# Altium PCB FPW1-0-2.PcbDoc (part 8 of 11)
Units mm, origin at the board's own origin, x right, y up, seen from the top; angles counter-clockwise.
Board outline 85 x 56 mm, 4 copper layers (Top Layer, GND_Plane, 3V3_Plane, Bottom Layer); 182 components, 321 nets, 1106 pads, 360 vias.
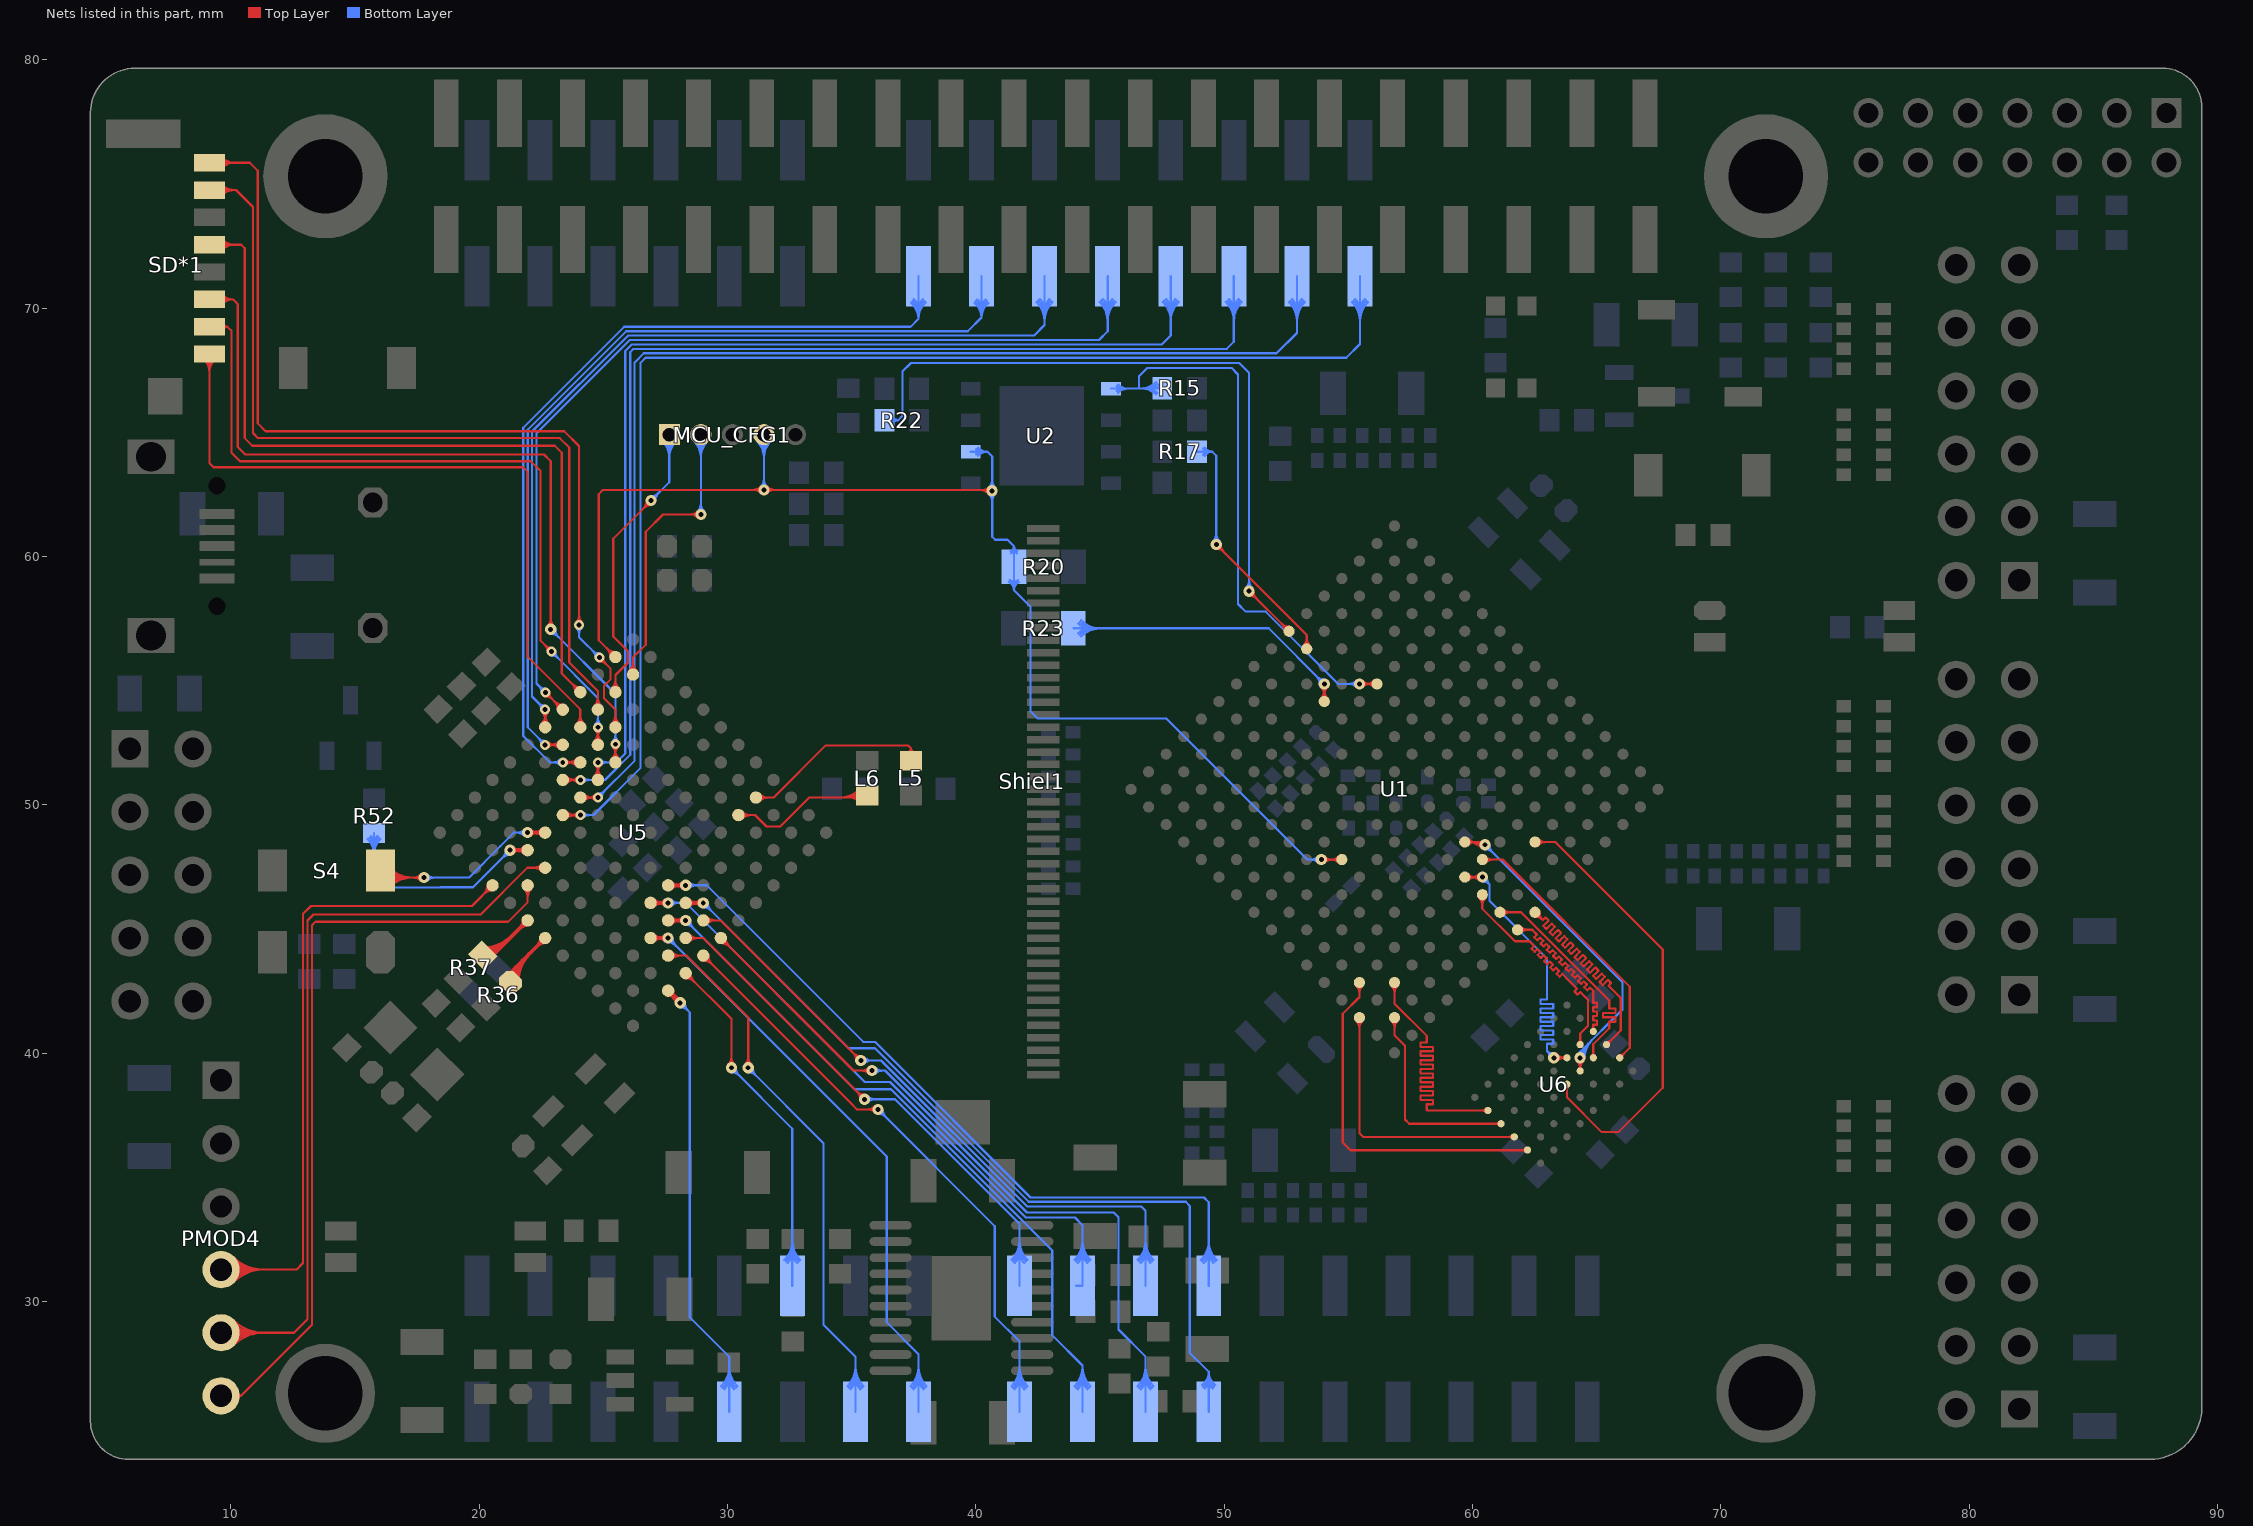
[diagram p10: the nets of this part, all layers, seen from the top]

## Via types
v1: diameter 0.45, hole 0.2, Top Layer to Bottom Layer, tented both sides, 280 vias
v2: diameter 0.61, hole 0.33, Top Layer to Bottom Layer, tented both sides, 40 vias
v3: diameter 0.403, hole 0.2, Top Layer to Bottom Layer, tented both sides, 15 vias
v4: diameter 0.5, hole 0.2, Top Layer to Bottom Layer, tented both sides, 12 vias
v5: diameter 0.864, hole 0.508, Top Layer to Bottom Layer, tented both sides, 11 vias
v6: diameter 0.864, hole 0.356, Top Layer to Bottom Layer, tented both sides, 1 vias
v7: diameter 0.864, hole 0.381, Top Layer to Bottom Layer, tented both sides, 1 vias

## Nets (pads, with @x,y where several pads share a name; then routed paths per layer and width w, separated by ;. In a path a pad name is that pad's centre, name@x,y a point inside that pad or via, vN(x,y) a via of type N, cw(c..) or ccw(c..) an arc to the next point about the centre after c; other vN are vias at no path point) (continued)
PTA24: Shiel1.37 U5.K12 | length 26.4
  Top Layer w0.089: U5.K12@27.613,42.317 cw(c27.613,41.821) 27.964,42.172 cw(c28.315,42.523) U5.K12@27.819,42.523 ; U5.K12@27.613,42.406 cw(c27.613,42.125) 27.813,42.324 cw(c28.012,42.523) U5.K12@27.73,42.523 ; U5.K12@27.613,42.523 v1(28.099,42.037) ; U5.K12@27.717,42.315 cw(c27.51,41.956) v1@27.92,42.012 ; U5.K12@27.822,42.419 ccw(c28.18,42.626) v1@28.124,42.216 ; 27.85,42.238 ccw(c27.983,42.47) v1@28.053,42.211 ; 27.875,42.224 cw(c27.738,41.987) v1@28.009,42.025 ; 27.898,42.287 cw(c27.667,42.153) v1@27.925,42.084 ; 27.912,42.262 ccw(c28.149,42.398) v1@28.112,42.128 ; v1@27.919,42.037 ccw(c27.483,42.037) 27.791,42.345 ccw(c28.099,42.653) v1@28.099,42.218
  Bottom Layer w0.089: v1@28.099,41.856 cw(c28.099,41.421) 28.408,41.729 cw(c28.716,42.037) v1@28.28,42.037 ; v1(28.099,42.037) 28.486,41.65 28.486,29.375 30.074,27.788 Shiel1.37@30.074,25.565 ; Shiel1.37@29.751,26.602 ccw(c28.974,27.38) 30.074,27.38 ccw(c31.173,27.38) Shiel1.37@30.396,26.602 ; Shiel1.37@29.814,26.539 ccw(c29.188,27.165) 30.074,27.165 ccw(c30.959,27.165) Shiel1.37@30.333,26.539 ; Shiel1.37@29.877,26.476 ccw(c29.403,26.951) 30.074,26.951 ccw(c30.744,26.951) Shiel1.37@30.27,26.476
PTA25: Shiel1.40 U5.J12 | length 21.1
  Top Layer w0.089: U5.J12@28.321,43.024 cw(c28.321,42.528) 28.671,42.879 cw(c29.022,43.23) U5.J12@28.526,43.23 ; U5.J12@28.321,43.113 cw(c28.321,42.832) 28.52,43.031 cw(c28.719,43.23) U5.J12@28.437,43.23 ; U5.J12@28.321,43.23 30.162,41.388 v1(30.162,39.421) ; v1@30.035,39.548 ccw(c29.727,39.857) 30.162,39.857 ccw(c30.598,39.857) v1@30.29,39.548
  Bottom Layer w0.089: v1@30.162,39.24 cw(c30.162,38.804) 30.471,39.113 cw(c30.779,39.421) v1@30.343,39.421 ; v1(30.162,39.421) 32.614,36.97 Shiel1.40@32.614,30.645 ; Shiel1.40@32.291,31.682 ccw(c31.514,32.46) 32.614,32.46 ccw(c33.713,32.46) Shiel1.40@32.936,31.682 ; Shiel1.40@32.354,31.619 ccw(c31.728,32.245) 32.614,32.245 ccw(c33.499,32.245) Shiel1.40@32.873,31.619 ; Shiel1.40@32.417,31.556 ccw(c31.943,32.031) 32.614,32.031 ccw(c33.284,32.031) Shiel1.40@32.81,31.556
PTA26: Shiel1.41 U5.J11 | length 28.7
  Top Layer w0.089: U5.J11@27.613,43.937 28.339,43.937 30.836,41.44 v1(30.836,39.421) ; U5.J11@27.696,43.855 cw(c27.895,43.655) 27.895,43.937 cw(c27.895,44.219) U5.J11@27.696,44.02 ; U5.J11@27.759,43.792 cw(c28.11,43.441) 28.11,43.937 cw(c28.11,44.433) U5.J11@27.759,44.082 ; v1@30.708,39.548 ccw(c30.4,39.857) 30.836,39.857 ccw(c31.271,39.857) v1@30.963,39.548
  Bottom Layer w0.089: v1@30.836,39.24 cw(c30.836,38.804) 31.144,39.113 cw(c31.452,39.421) v1@31.016,39.421 ; v1(30.836,39.421) 33.871,36.386 33.871,29.07 35.154,27.788 Shiel1.41@35.154,25.565 ; Shiel1.41@34.831,26.602 ccw(c34.054,27.38) 35.154,27.38 ccw(c36.253,27.38) Shiel1.41@35.476,26.602 ; Shiel1.41@34.894,26.539 ccw(c34.268,27.165) 35.154,27.165 ccw(c36.039,27.165) Shiel1.41@35.413,26.539 ; Shiel1.41@34.957,26.476 ccw(c34.483,26.951) 35.154,26.951 ccw(c35.824,26.951) Shiel1.41@35.35,26.476
PTA27: Shiel1.43 U5.J10 | length 32
  Top Layer w0.089: U5.J10@26.906,44.644 v1(27.613,44.644) ; U5.J10@26.989,44.562 cw(c27.188,44.363) 27.188,44.644 cw(c27.188,44.926) U5.J10@26.989,44.727 ; U5.J10@27.052,44.499 cw(c27.403,44.148) 27.403,44.644 cw(c27.403,45.14) U5.J10@27.052,44.79 ; 27.246,44.602 cw(c27.303,44.388) v1@27.474,44.529 ; 27.246,44.686 ccw(c27.303,44.901) v1@27.474,44.759 ; 27.306,44.618 ccw(c27.241,44.859) v1@27.457,44.734 ; 27.306,44.67 cw(c27.241,44.429) v1@27.457,44.554 ; 27.379,44.638 cw(c27.421,44.485) v1@27.543,44.586 ; 27.379,44.65 ccw(c27.421,44.804) v1@27.543,44.703 ; v1@27.486,44.517 ccw(c27.178,44.208) 27.178,44.644 ccw(c27.178,45.08) v1@27.486,44.772
  Bottom Layer w0.089: v1@27.613,44.464 cw(c27.613,44.028) 27.922,44.336 cw(c28.23,44.644) v1@27.794,44.644 ; v1(27.613,44.644) 36.411,35.847 36.411,29.172 37.694,27.889 Shiel1.43@37.694,25.565 ; Shiel1.43@37.371,26.602 ccw(c36.594,27.38) 37.694,27.38 ccw(c38.793,27.38) Shiel1.43@38.016,26.602 ; Shiel1.43@37.434,26.539 ccw(c36.808,27.165) 37.694,27.165 ccw(c38.579,27.165) Shiel1.43@37.953,26.539 ; Shiel1.43@37.497,26.476 ccw(c37.023,26.951) 37.694,26.951 ccw(c38.364,26.951) Shiel1.43@37.89,26.476
PTA28: Shiel1.45 U5.H12 | length 30.9
  Top Layer w0.089: U5.H12@29.028,43.732 cw(c29.028,43.235) 29.379,43.586 cw(c29.729,43.937) U5.H12@29.233,43.937 ; U5.H12@29.028,43.82 cw(c29.028,43.539) 29.227,43.738 cw(c29.426,43.937) U5.H12@29.144,43.937 ; U5.H12@29.028,43.937 34.973,37.992 34.973,37.987 35.205,37.754 35.21,37.754 35.22,37.744 v1(36.068,37.744) ; v1@35.94,37.617 ccw(c35.632,37.309) 35.632,37.744 ccw(c35.632,38.18) v1@35.94,37.872
  Bottom Layer w0.089: v1@36.068,37.564 cw(c36.068,37.128) 36.376,37.436 cw(c36.684,37.744) v1@36.249,37.744 ; v1(36.068,37.744) 40.767,33.045 40.767,29.4 41.758,28.41 Shiel1.45@41.758,25.565 ; Shiel1.45@41.435,26.602 ccw(c40.658,27.38) 41.758,27.38 ccw(c42.857,27.38) Shiel1.45@42.08,26.602 ; Shiel1.45@41.498,26.539 ccw(c40.872,27.165) 41.758,27.165 ccw(c42.643,27.165) Shiel1.45@42.017,26.539 ; Shiel1.45@41.561,26.476 ccw(c41.087,26.951) 41.758,26.951 ccw(c42.428,26.951) Shiel1.45@41.954,26.476
PTA29: Shiel1.46 U5.H11 | length 27.5
  Top Layer w0.089: U5.H11@28.321,44.644 29.029,44.644 v1(35.522,38.151) ; U5.H11@28.403,44.562 cw(c28.602,44.363) 28.602,44.644 cw(c28.602,44.926) U5.H11@28.403,44.727 ; U5.H11@28.466,44.499 cw(c28.817,44.148) 28.817,44.644 cw(c28.817,45.14) U5.H11@28.466,44.79 ; v1@35.341,38.151 ccw(c34.905,38.151) 35.214,38.459 ccw(c35.522,38.767) v1@35.522,38.331
  Bottom Layer w0.089: v1(35.522,38.151) 36.744,38.151 41.758,33.137 Shiel1.46@41.758,30.645 ; v1@35.65,38.023 cw(c35.958,37.715) 35.958,38.151 cw(c35.958,38.587) v1@35.65,38.278 ; Shiel1.46@41.435,31.682 ccw(c40.658,32.46) 41.758,32.46 ccw(c42.857,32.46) Shiel1.46@42.08,31.682 ; Shiel1.46@41.498,31.619 ccw(c40.872,32.245) 41.758,32.245 ccw(c42.643,32.245) Shiel1.46@42.017,31.619 ; Shiel1.46@41.561,31.556 ccw(c41.087,32.031) 41.758,32.031 ccw(c42.428,32.031) Shiel1.46@41.954,31.556
PTB0: Shiel1.47 U5.H10 | length 36
  Top Layer w0.089: U5.H10@27.613,45.351 v1(28.321,45.351) ; U5.H10@27.696,45.269 cw(c27.895,45.07) 27.895,45.351 cw(c27.895,45.633) U5.H10@27.696,45.434 ; U5.H10@27.759,45.206 cw(c28.11,44.855) 28.11,45.351 cw(c28.11,45.848) U5.H10@27.759,45.497 ; 27.953,45.309 cw(c28.01,45.095) v1@28.181,45.236 ; 27.953,45.393 ccw(c28.01,45.608) v1@28.181,45.466 ; 28.013,45.325 ccw(c27.948,45.566) v1@28.164,45.442 ; 28.013,45.377 cw(c27.948,45.136) v1@28.164,45.261 ; 28.087,45.345 cw(c28.128,45.192) v1@28.25,45.293 ; 28.087,45.357 ccw(c28.128,45.511) v1@28.25,45.41 ; v1@28.193,45.224 ccw(c27.885,44.915) 27.885,45.351 ccw(c27.885,45.787) v1@28.193,45.479
  Bottom Layer w0.089: v1@28.321,45.171 cw(c28.321,44.735) 28.629,45.043 cw(c28.937,45.351) v1@28.501,45.351 ; v1(28.321,45.351) 35.115,38.557 36.589,38.557 43.078,32.068 43.078,28.651 44.298,27.432 Shiel1.47@44.298,25.565 ; Shiel1.47@43.975,26.602 ccw(c43.198,27.38) 44.298,27.38 ccw(c45.397,27.38) Shiel1.47@44.62,26.602 ; Shiel1.47@44.038,26.539 ccw(c43.412,27.165) 44.298,27.165 ccw(c45.183,27.165) Shiel1.47@44.557,26.539 ; Shiel1.47@44.101,26.476 ccw(c43.627,26.951) 44.298,26.951 ccw(c44.968,26.951) Shiel1.47@44.494,26.476
PTB1: Shiel1.48 U5.H9 | length 33.5
  Top Layer w0.089: U5.H9@26.906,46.058 v1(27.613,46.058) ; U5.H9@26.989,45.976 cw(c27.188,45.777) 27.188,46.058 cw(c27.188,46.34) U5.H9@26.989,46.141 ; U5.H9@27.052,45.913 cw(c27.403,45.562) 27.403,46.058 cw(c27.403,46.555) U5.H9@27.052,46.204 ; 27.246,46.016 cw(c27.303,45.802) v1@27.474,45.943 ; 27.246,46.1 ccw(c27.303,46.315) v1@27.474,46.173 ; 27.306,46.032 ccw(c27.241,46.273) v1@27.457,46.149 ; 27.306,46.084 cw(c27.241,45.843) v1@27.457,45.968 ; 27.379,46.052 cw(c27.421,45.899) v1@27.543,46 ; 27.379,46.065 ccw(c27.421,46.218) v1@27.543,46.117 ; v1@27.486,45.931 ccw(c27.178,45.623) 27.178,46.058 ccw(c27.178,46.494) v1@27.486,46.186
  Bottom Layer w0.089: v1(27.613,46.058) 28.326,46.058 35.535,38.849 36.548,38.849 42.009,33.388 43.993,33.388 44.298,33.083 Shiel1.48@44.298,30.645 Shiel1.48@44.044,30.645 ; v1@27.741,45.931 cw(c28.049,45.623) 28.049,46.058 cw(c28.049,46.494) v1@27.741,46.186 ; Shiel1.48@43.975,31.682 ccw(c43.198,32.46) 44.298,32.46 ccw(c45.397,32.46) Shiel1.48@44.62,31.682 ; Shiel1.48@44.038,31.619 ccw(c43.412,32.245) 44.298,32.245 ccw(c45.183,32.245) Shiel1.48@44.557,31.619 ; Shiel1.48@44.101,31.556 ccw(c43.627,32.031) 44.298,32.031 ccw(c44.968,32.031) Shiel1.48@44.494,31.556
PTB2: Shiel1.49 U5.G12 | length 35.7
  Top Layer w0.089: U5.G12@29.735,44.439 cw(c29.735,43.942) 30.086,44.293 cw(c30.437,44.644) U5.G12@29.94,44.644 ; U5.G12@29.735,44.528 cw(c29.735,44.246) 29.934,44.445 cw(c30.133,44.644) U5.G12@29.851,44.644 ; U5.G12@29.735,44.644 35.072,39.306 v1(35.827,39.306) ; v1@35.699,39.179 ccw(c35.391,38.871) 35.391,39.306 ccw(c35.391,39.742) v1@35.699,39.434
  Bottom Layer w0.089: v1(35.827,39.306) 36.342,39.306 42.057,33.591 45.555,33.591 45.745,33.401 45.745,28.88 46.838,27.788 Shiel1.49@46.838,25.565 ; v1@35.954,39.179 cw(c36.263,38.871) 36.263,39.306 cw(c36.263,39.742) v1@35.954,39.434 ; Shiel1.49@46.515,26.602 ccw(c45.738,27.38) 46.838,27.38 ccw(c47.937,27.38) Shiel1.49@47.16,26.602 ; Shiel1.49@46.578,26.539 ccw(c45.952,27.165) 46.838,27.165 ccw(c47.723,27.165) Shiel1.49@47.097,26.539 ; Shiel1.49@46.641,26.476 ccw(c46.167,26.951) 46.838,26.951 ccw(c47.508,26.951) Shiel1.49@47.034,26.476
PTB3: Shiel1.50 U5.G11 | length 32.4
  Top Layer w0.089: U5.G11@29.028,45.351 29.731,45.351 v1(35.369,39.713) ; U5.G11@29.11,45.269 cw(c29.309,45.07) 29.309,45.351 cw(c29.309,45.633) U5.G11@29.11,45.434 ; U5.G11@29.173,45.206 cw(c29.524,44.855) 29.524,45.351 cw(c29.524,45.848) U5.G11@29.173,45.497 ; v1@35.189,39.713 ccw(c34.753,39.713) 35.061,40.021 ccw(c35.369,40.329) v1@35.369,39.893
  Bottom Layer w0.089: v1(35.369,39.713) 36.187,39.713 42.068,33.833 46.66,33.833 46.838,33.655 Shiel1.50@46.838,30.645 ; v1@35.497,39.585 cw(c35.805,39.277) 35.805,39.713 cw(c35.805,40.149) v1@35.497,39.841 ; Shiel1.50@46.515,31.682 ccw(c45.738,32.46) 46.838,32.46 ccw(c47.937,32.46) Shiel1.50@47.16,31.682 ; Shiel1.50@46.578,31.619 ccw(c45.952,32.245) 46.838,32.245 ccw(c47.723,32.245) Shiel1.50@47.097,31.619 ; Shiel1.50@46.641,31.556 ccw(c46.167,32.031) 46.838,32.031 ccw(c47.508,32.031) Shiel1.50@47.034,31.556
PTB4: Shiel1.51 U5.G10 | length 40.8
  Top Layer w0.089: U5.G10@28.321,46.058 v1(29.028,46.058) ; U5.G10@28.403,45.976 cw(c28.602,45.777) 28.602,46.058 cw(c28.602,46.34) U5.G10@28.403,46.141 ; U5.G10@28.466,45.913 cw(c28.817,45.562) 28.817,46.058 cw(c28.817,46.555) U5.G10@28.466,46.204 ; 28.66,46.016 cw(c28.717,45.802) v1@28.889,45.943 ; 28.66,46.1 ccw(c28.717,46.315) v1@28.889,46.173 ; 28.72,46.032 ccw(c28.655,46.273) v1@28.871,46.149 ; 28.72,46.084 cw(c28.655,45.843) v1@28.871,45.968 ; 28.794,46.052 cw(c28.835,45.899) v1@28.957,46 ; 28.794,46.065 ccw(c28.835,46.218) v1@28.957,46.117 ; v1@28.9,45.931 ccw(c28.592,45.623) 28.592,46.058 ccw(c28.592,46.494) v1@28.9,46.186
  Bottom Layer w0.089: v1@29.028,45.878 cw(c29.028,45.442) 29.336,45.75 cw(c29.644,46.058) v1@29.208,46.058 ; v1(29.028,46.058) 34.878,40.208 35.944,40.208 42.128,34.023 48.45,34.023 48.616,33.858 48.616,27.94 49.378,27.178 ; Shiel1.51@49.109,26.648 ccw(c48.721,27.178) 49.378,27.178 ; Shiel1.51@49.161,26.576 ccw(c48.849,27.003) 49.378,27.003 ccw(c49.906,27.003) Shiel1.51@49.594,26.576 ; Shiel1.51@49.214,26.504 ccw(c48.977,26.828) 49.378,26.828 ccw(c49.778,26.828) Shiel1.51@49.542,26.504 ; Shiel1.51@49.378,25.565 49.378,27.178 ; Shiel1.51@49.647,26.648 cw(c50.035,27.178) 49.378,27.178
PTB5: Shiel1.52 U5.G9 | length 38.4
  Top Layer w0.089: U5.G9@27.613,46.765 v1(28.321,46.765) ; U5.G9@27.696,46.683 cw(c27.895,46.484) 27.895,46.765 cw(c27.895,47.047) U5.G9@27.696,46.848 ; U5.G9@27.759,46.62 cw(c28.11,46.269) 28.11,46.765 cw(c28.11,47.262) U5.G9@27.759,46.911 ; 27.953,46.723 cw(c28.01,46.509) v1@28.181,46.65 ; 27.953,46.808 ccw(c28.01,47.022) v1@28.181,46.88 ; 28.013,46.739 ccw(c27.948,46.981) v1@28.164,46.856 ; 28.013,46.791 cw(c27.948,46.55) v1@28.164,46.675 ; 28.087,46.759 cw(c28.128,46.606) v1@28.25,46.707 ; 28.087,46.772 ccw(c28.128,46.925) v1@28.25,46.824 ; v1@28.193,46.638 ccw(c27.885,46.33) 27.885,46.765 ccw(c27.885,47.201) v1@28.193,46.893
  Bottom Layer w0.089: v1(28.321,46.765) 29.168,46.765 35.471,40.462 35.941,40.462 42.202,34.201 49.187,34.201 49.378,34.011 Shiel1.52@49.378,30.645 ; v1@28.448,46.638 cw(c28.756,46.33) 28.756,46.765 cw(c28.756,47.201) v1@28.448,46.893 ; Shiel1.52@49.055,31.682 ccw(c48.278,32.46) 49.378,32.46 ccw(c50.477,32.46) Shiel1.52@49.7,31.682 ; Shiel1.52@49.118,31.619 ccw(c48.492,32.245) 49.378,32.245 ccw(c50.263,32.245) Shiel1.52@49.637,31.619 ; Shiel1.52@49.181,31.556 ccw(c48.707,32.031) 49.378,32.031 ccw(c50.048,32.031) Shiel1.52@49.574,31.556
PTD8: L6.1 U5.C9 | length 10.1
  Top Layer w0.089: U5.C9@30.442,49.594 31.115,49.594 31.572,49.136 32.131,49.136 33.299,50.305 L6.1@35.395,50.305 ; U5.C9@30.524,49.511 cw(c30.724,49.312) 30.724,49.594 cw(c30.724,49.876) U5.C9@30.524,49.676 ; U5.C9@30.587,49.449 cw(c30.938,49.098) 30.938,49.594 cw(c30.938,50.09) U5.C9@30.587,49.739 ; 34.535,50.305 ccw(c34.535,51.418) L6.1@35.322,50.631 ; 34.749,50.305 ccw(c34.749,51.203) L6.1@35.385,50.568 ; 34.895,50.305 cw(c34.895,49.701) L6.1@35.322,50.128 ; 34.964,50.305 ccw(c34.964,50.989) L6.1@35.448,50.505 ; 35.11,50.305 cw(c35.11,49.916) L6.1@35.385,50.191 ; L6.1@35.179,50.305 ccw(c35.179,50.774) L6.1@35.511,50.442
PTD9: L5.1 U5.B9 | length 9.3
  Top Layer w0.089: U5.B9@31.149,50.301 31.861,50.301 33.96,52.4 37.275,52.4 37.389,52.286 ; U5.B9@31.231,50.219 cw(c31.431,50.019) 31.431,50.301 cw(c31.431,50.583) U5.B9@31.231,50.384 ; U5.B9@31.294,50.156 cw(c31.645,49.805) 31.645,50.301 cw(c31.645,50.797) U5.B9@31.294,50.446 ; L5.1@37.268,52.114 ccw(c37.206,52.286) 37.389,52.286 ; L5.1@37.389,51.779 37.389,52.286 ; L5.1@37.51,52.114 cw(c37.572,52.286) 37.389,52.286
PTE0: SD*1.8 U5.D3 | length 43.3
  Top Layer w0.089: SD*1.8@9.144,75.857 10.77,75.857 11.087,75.54 11.087,65.367 11.405,65.049 23.431,65.049 24.028,64.453 v3(24.028,57.252) ; SD*1.8@9.572,75.704 cw(c9.942,75.334) 9.942,75.857 cw(c9.942,76.38) SD*1.8@9.572,76.01 ; SD*1.8@9.635,75.641 cw(c10.157,75.119) 10.157,75.857 cw(c10.157,76.595) SD*1.8@9.635,76.073 ; v3@23.917,57.363 ccw(c23.649,57.631) 24.028,57.631 ccw(c24.408,57.631) v3@24.139,57.363 ; v3@24.841,55.786 cw(c24.841,55.407) 25.109,55.675 cw(c25.377,55.944) v3@24.998,55.944 ; v3(24.841,55.944) 25.298,55.486 25.298,55.067 25.032,54.8 25.032,54.297 25.492,53.837 U5.D3@25.492,53.129 ; U5.D3@25.347,53.275 ccw(c24.996,53.626) 25.492,53.626 ccw(c25.988,53.626) U5.D3@25.637,53.275 ; U5.D3@25.41,53.212 ccw(c25.211,53.411) 25.492,53.411 ccw(c25.774,53.411) U5.D3@25.575,53.212
  Bottom Layer w0.089: v3@23.917,57.141 cw(c23.649,56.872) 24.028,56.872 cw(c24.408,56.872) v3@24.139,57.141 ; v3(24.028,57.252) 24.028,56.756 v3(24.841,55.944) ; v3@24.684,55.944 ccw(c24.305,55.944) 24.573,56.212 ccw(c24.841,56.48) v3@24.841,56.101
PTE1: SD*1.7 U5.D2 | length 38.4
  Top Layer w0.089: SD*1.7@9.144,74.757 10.219,74.757 10.897,74.079 10.897,64.973 11.1,64.77 23.254,64.77 23.635,64.389 23.635,55.74 24.785,54.59 U5.D2@24.785,53.837 ; SD*1.7@9.572,74.604 cw(c9.942,74.234) 9.942,74.757 cw(c9.942,75.28) SD*1.7@9.572,74.91 ; SD*1.7@9.635,74.541 cw(c10.157,74.019) 10.157,74.757 cw(c10.157,75.495) SD*1.7@9.635,74.973 ; U5.D2@24.64,53.982 ccw(c24.289,54.333) 24.785,54.333 ccw(c25.281,54.333) U5.D2@24.93,53.982 ; U5.D2@24.703,53.919 ccw(c24.503,54.118) 24.785,54.118 ccw(c25.067,54.118) U5.D2@24.868,53.919
PTE2: SD*1.5 U5.D1 | length 35.3
  Top Layer w0.089: SD*1.5@9.144,72.557 10.425,72.557 10.566,72.415 10.566,64.77 10.871,64.465 23.05,64.465 23.33,64.186 23.33,55.292 U5.D1@24.078,54.544 ; SD*1.5@9.572,72.404 cw(c9.942,72.034) 9.942,72.557 cw(c9.942,73.08) SD*1.5@9.572,72.71 ; SD*1.5@9.635,72.341 cw(c10.157,71.819) 10.157,72.557 cw(c10.157,73.295) SD*1.5@9.635,72.773 ; U5.D1@23.872,54.544 ccw(c23.376,54.544) 23.727,54.895 ccw(c24.078,55.245) U5.D1@24.078,54.749 ; U5.D1@23.961,54.544 ccw(c23.68,54.544) 23.879,54.743 ccw(c24.078,54.942) U5.D1@24.078,54.66
PTE3: SD*1.3 U5.E4 | length 38.5
  Top Layer w0.089: SD*1.3@9.144,70.357 10.097,70.357 ; SD*1.3@9.581,70.214 cw(c9.9,69.931) 9.9,70.357 cw(c9.9,70.783) SD*1.3@9.581,70.501 ; SD*1.3@9.648,70.155 cw(c10.097,69.757) 10.097,70.357 ; SD*1.3@9.648,70.56 ccw(c10.097,70.957) 10.097,70.357 ; v1@22.758,57.201 ccw(c22.45,57.51) 22.885,57.51 ccw(c23.321,57.51) v1@23.013,57.201 ; v1(22.885,57.074) 22.885,63.843 22.619,64.11 10.592,64.11 10.287,64.414 10.287,70.168 10.097,70.357 ; U5.E4@25.347,51.861 ccw(c24.996,52.211) 25.492,52.211 ccw(c25.988,52.211) U5.E4@25.637,51.861 ; v3@25.381,52.335 cw(c25.113,52.067) 25.492,52.067 cw(c25.871,52.067) v3@25.603,52.335 ; U5.E4@25.41,51.798 ccw(c25.211,51.997) 25.492,51.997 ccw(c25.774,51.997) U5.E4@25.575,51.798 ; U5.E4@25.492,51.715 v3(25.492,52.446)
  Bottom Layer w0.089: v1@22.885,56.893 cw(c22.885,56.457) 23.194,56.766 cw(c23.502,57.074) v1@23.066,57.074 ; v1(22.885,57.074) 25.492,54.467 v3(25.492,52.446) ; v3@25.381,52.557 ccw(c25.113,52.825) 25.492,52.825 ccw(c25.871,52.825) v3@25.603,52.557
PTE4: SD*1.2 U5.E3 | length 34.6
  Top Layer w0.089: SD*1.2@9.144,69.257 9.864,69.257 ; SD*1.2@9.704,69.147 cw(c9.864,69.086) 9.864,69.257 ; SD*1.2@9.704,69.367 ccw(c9.864,69.428) 9.864,69.257 ; v3@22.752,56.185 ccw(c22.373,56.185) 22.641,56.453 ccw(c22.909,56.721) v3@22.909,56.342 ; v3(22.909,56.185) 22.479,56.615 22.479,63.449 22.085,63.843 10.376,63.843 10.033,64.186 10.033,69.088 9.864,69.257 ; U5.E3@24.64,52.568 ccw(c24.289,52.919) 24.785,52.919 ccw(c25.281,52.919) U5.E3@24.93,52.568 ; v3@24.674,53.018 cw(c24.406,52.75) 24.785,52.75 cw(c25.164,52.75) v3@24.896,53.018 ; U5.E3@24.703,52.505 ccw(c24.503,52.704) 24.785,52.704 ccw(c25.067,52.704) U5.E3@24.868,52.505 ; U5.E3@24.785,52.422 v3(24.785,53.129)
  Bottom Layer w0.089: v3@22.909,56.028 cw(c22.909,55.649) 23.177,55.917 cw(c23.445,56.185) v3@23.066,56.185 ; v3(22.909,56.185) 24.785,54.309 v3(24.785,53.129) ; v3@24.674,53.241 ccw(c24.406,53.509) 24.785,53.509 ccw(c25.164,53.509) v3@24.896,53.241
PTE5: SD*1.1 U5.E2 | length 31.7
  Top Layer w0.089: SD*1.1@8.928,67.941 cw(c8.406,67.419) 9.144,67.419 cw(c9.882,67.419) SD*1.1@9.36,67.941 ; SD*1.1@8.991,68.004 cw(c8.621,67.634) 9.144,67.634 cw(c9.667,67.634) SD*1.1@9.297,68.004 ; SD*1.1@9.144,68.157 9.144,63.767 9.309,63.602 21.768,63.602 21.957,63.413 21.957,55.971 24.078,53.849 U5.E2@24.078,53.129 ; U5.E2@23.933,53.275 ccw(c23.582,53.626) 24.078,53.626 ccw(c24.574,53.626) U5.E2@24.223,53.275 ; U5.E2@23.995,53.212 ccw(c23.796,53.411) 24.078,53.411 ccw(c24.36,53.411) U5.E2@24.16,53.212
PTE6: Shiel1.19 U5.E1 | length 45.1
  Top Layer w0.089: v3@22.669,54.377 cw(c22.669,53.988) 22.945,54.263 ; v3@22.672,54.536 U5.E1@23.371,53.837 ; v3@22.827,54.534 ccw(c23.196,54.534) 22.935,54.273 ; U5.E1@23.165,53.837 ccw(c22.669,53.837) 23.02,54.187 ccw(c23.371,54.538) U5.E1@23.371,54.042 ; U5.E1@23.254,53.837 ccw(c22.973,53.837) 23.172,54.036 ccw(c23.371,54.235) U5.E1@23.371,53.953
  Bottom Layer w0.089: v3@22.512,54.534 ccw(c22.133,54.534) 22.401,54.802 ccw(c22.669,55.07) v3@22.669,54.691 ; v3(22.669,54.534) 22.314,54.889 22.314,64.963 26.07,68.72 44.958,68.72 45.309,69.07 Shiel1.19@45.309,71.285 ; Shiel1.19@44.986,70.248 cw(c44.209,69.47) 45.309,69.47 cw(c46.408,69.47) Shiel1.19@45.631,70.248 ; Shiel1.19@45.049,70.311 cw(c44.423,69.685) 45.309,69.685 cw(c46.194,69.685) Shiel1.19@45.568,70.311 ; Shiel1.19@45.112,70.374 cw(c44.638,69.9) 45.309,69.9 cw(c45.979,69.9) Shiel1.19@45.505,70.374
PTE7: Shiel1.21 U5.F4 | length 49.4
  Top Layer w0.089: U5.F4@24.64,51.153 ccw(c24.289,51.504) 24.785,51.504 ccw(c25.281,51.504) U5.F4@24.93,51.153 ; v3@24.674,51.604 cw(c24.406,51.336) 24.785,51.336 cw(c25.164,51.336) v3@24.896,51.604 ; U5.F4@24.703,51.091 ccw(c24.503,51.29) 24.785,51.29 ccw(c25.067,51.29) U5.F4@24.868,51.091 ; U5.F4@24.785,51.008 v3(24.785,51.715)
  Bottom Layer w0.089: v3(24.785,51.715) 25.528,51.715 25.883,52.07 25.883,68.28 26.144,68.542 47.485,68.542 47.849,68.905 Shiel1.21@47.849,71.285 ; v3@24.896,51.604 cw(c25.164,51.336) 25.164,51.715 cw(c25.164,52.094) v3@24.896,51.826 ; Shiel1.21@47.526,70.248 cw(c46.749,69.47) 47.849,69.47 cw(c48.948,69.47) Shiel1.21@48.171,70.248 ; Shiel1.21@47.589,70.311 cw(c46.963,69.685) 47.849,69.685 cw(c48.734,69.685) Shiel1.21@48.108,70.311 ; Shiel1.21@47.652,70.374 cw(c47.178,69.9) 47.849,69.9 cw(c48.519,69.9) Shiel1.21@48.045,70.374
PTE8: Shiel1.13 U5.F3 | length 40.6
  Top Layer w0.089: v3(23.371,51.715) U5.F3@24.078,51.715 ; v3@23.482,51.604 cw(c23.75,51.336) 23.75,51.715 cw(c23.75,52.094) v3@23.482,51.826 ; U5.F3@23.933,51.57 ccw(c23.582,51.219) 23.582,51.715 ccw(c23.582,52.211) U5.F3@23.933,51.861 ; U5.F3@23.995,51.633 ccw(c23.796,51.434) 23.796,51.715 ccw(c23.796,51.997) U5.F3@23.995,51.798
  Bottom Layer w0.089: v3@23.26,51.604 ccw(c22.992,51.336) 22.992,51.715 ccw(c22.992,52.094) v3@23.26,51.826 ; v3(23.371,51.715) 22.843,51.715 21.78,52.778 21.78,65.184 25.85,69.253 37.376,69.253 37.689,69.566 ; Shiel1.13@37.389,70.227 cw(c36.809,69.566) 37.689,69.566 ; Shiel1.13@37.447,70.294 cw(c36.981,69.762) 37.689,69.762 cw(c38.397,69.762) Shiel1.13@37.93,70.294 ; Shiel1.13@37.506,70.361 cw(c37.152,69.958) 37.689,69.958 cw(c38.225,69.958) Shiel1.13@37.872,70.361 ; Shiel1.13@37.689,71.285 37.689,69.566 ; Shiel1.13@37.989,70.227 ccw(c38.568,69.566) 37.689,69.566
PTE9: Shiel1.15 U5.F2 | length 41.1
  Top Layer w0.089: v3(22.664,52.422) U5.F2@23.371,52.422 ; v3@22.775,52.311 cw(c23.043,52.043) 23.043,52.422 cw(c23.043,52.801) v3@22.775,52.533 ; U5.F2@23.225,52.277 ccw(c22.875,51.926) 22.875,52.422 ccw(c22.875,52.919) U5.F2@23.225,52.568 ; U5.F2@23.288,52.34 ccw(c23.089,52.141) 23.089,52.422 ccw(c23.089,52.704) U5.F2@23.288,52.505
  Bottom Layer w0.089: v3@22.507,52.422 ccw(c22.128,52.422) 22.396,52.69 ccw(c22.664,52.959) v3@22.664,52.579 ; v3(22.664,52.422) 21.958,53.128 21.958,65.11 25.923,69.075 39.675,69.075 40.229,69.629 ; Shiel1.15@39.946,70.213 cw(c39.485,69.629) 40.229,69.629 ; Shiel1.15@40.001,70.282 cw(c39.63,69.813) 40.229,69.813 cw(c40.827,69.813) Shiel1.15@40.456,70.282 ; Shiel1.15@40.056,70.352 cw(c39.775,69.996) 40.229,69.996 cw(c40.682,69.996) Shiel1.15@40.401,70.352 ; Shiel1.15@40.229,71.285 40.229,69.629 ; Shiel1.15@40.511,70.213 ccw(c40.973,69.629) 40.229,69.629
PTE10: Shiel1.17 U5.F1 | length 43.1
  Top Layer w0.089: U5.F1@22.518,53.275 ccw(c22.167,53.626) 22.664,53.626 ccw(c23.16,53.626) U5.F1@22.809,53.275 ; v3@22.553,53.726 cw(c22.285,53.457) 22.664,53.457 cw(c23.043,53.457) v3@22.775,53.726 ; U5.F1@22.581,53.212 ccw(c22.382,53.411) 22.664,53.411 ccw(c22.945,53.411) U5.F1@22.746,53.212 ; U5.F1@22.664,53.129 v3(22.664,53.837)
  Bottom Layer w0.089: v3@22.507,53.837 ccw(c22.128,53.837) 22.396,54.105 ccw(c22.664,54.373) v3@22.664,53.994 ; v3(22.664,53.837) 22.136,54.364 22.136,65.037 25.997,68.897 42.342,68.897 42.769,69.324 Shiel1.17@42.769,71.285 ; Shiel1.17@42.446,70.248 cw(c41.669,69.47) 42.769,69.47 cw(c43.868,69.47) Shiel1.17@43.091,70.248 ; Shiel1.17@42.509,70.311 cw(c41.883,69.685) 42.769,69.685 cw(c43.654,69.685) Shiel1.17@43.028,70.311 ; Shiel1.17@42.572,70.374 cw(c42.098,69.9) 42.769,69.9 cw(c43.439,69.9) Shiel1.17@42.965,70.374
PTE11: Shiel1.25 U5.G4 | length 54.9
  Top Layer w0.089: U5.G4@24.078,50.301 v3(24.785,50.301) ; U5.G4@24.16,50.219 cw(c24.36,50.019) 24.36,50.301 cw(c24.36,50.583) U5.G4@24.16,50.384 ; U5.G4@24.223,50.156 cw(c24.574,49.805) 24.574,50.301 cw(c24.574,50.797) U5.G4@24.223,50.446 ; v3@24.674,50.19 ccw(c24.406,49.922) 24.406,50.301 ccw(c24.406,50.68) v3@24.674,50.412
  Bottom Layer w0.089: v3(24.785,50.301) 26.264,51.78 26.264,67.818 26.632,68.186 52.108,68.186 52.929,69.007 Shiel1.25@52.929,71.285 ; v3@24.785,50.458 ccw(c24.785,50.837) 25.053,50.569 ccw(c25.321,50.301) v3@24.942,50.301 ; Shiel1.25@52.606,70.248 cw(c51.829,69.47) 52.929,69.47 cw(c54.028,69.47) Shiel1.25@53.251,70.248 ; Shiel1.25@52.669,70.311 cw(c52.043,69.685) 52.929,69.685 cw(c53.814,69.685) Shiel1.25@53.188,70.311 ; Shiel1.25@52.732,70.374 cw(c52.258,69.9) 52.929,69.9 cw(c53.599,69.9) Shiel1.25@53.125,70.374
PTE12: Shiel1.23 U5.G3 | length 53
  Top Layer w0.089: U5.G3@23.371,51.008 v3(24.078,51.008) ; U5.G3@23.453,50.926 cw(c23.652,50.727) 23.652,51.008 cw(c23.652,51.29) U5.G3@23.453,51.091 ; U5.G3@23.516,50.863 cw(c23.867,50.512) 23.867,51.008 cw(c23.867,51.504) U5.G3@23.516,51.153 ; v3@23.967,50.897 ccw(c23.699,50.629) 23.699,51.008 ccw(c23.699,51.387) v3@23.967,51.119
  Bottom Layer w0.089: v3(24.078,51.008) 25.072,51.008 26.086,52.022 26.086,68.232 26.218,68.364 50.102,68.364 50.389,68.651 Shiel1.23@50.389,71.285 ; v3@24.189,50.897 cw(c24.457,50.629) 24.457,51.008 cw(c24.457,51.387) v3@24.189,51.119 ; Shiel1.23@50.066,70.248 cw(c49.289,69.47) 50.389,69.47 cw(c51.488,69.47) Shiel1.23@50.711,70.248 ; Shiel1.23@50.129,70.311 cw(c49.503,69.685) 50.389,69.685 cw(c51.274,69.685) Shiel1.23@50.648,70.311 ; Shiel1.23@50.192,70.374 cw(c49.718,69.9) 50.389,69.9 cw(c51.059,69.9) Shiel1.23@50.585,70.374
PTE24: PMOD4.4 U5.M4 | length 36.8
  Top Layer w0.089: PMOD4.4@9.614,31.293 12.649,31.293 12.916,31.559 12.916,45.618 13.233,45.936 19.713,45.936 U5.M4@20.542,46.765 ; PMOD4.4@9.861,31.045 cw(c10.459,30.448) 10.459,31.293 cw(c10.459,32.138) PMOD4.4@9.861,31.54 ; PMOD4.4@9.924,30.982 cw(c10.673,30.233) 10.673,31.293 cw(c10.673,32.352) PMOD4.4@9.924,31.603 ; PMOD4.4@9.987,30.92 cw(c10.888,30.019) 10.888,31.293 cw(c10.888,32.567) PMOD4.4@9.987,31.666 ; PMOD4.4@10.05,30.857 cw(c11.103,29.804) 11.103,31.293 cw(c11.103,32.782) PMOD4.4@10.05,31.729 ; PMOD4.4@10.113,30.794 cw(c11.317,29.589) 11.317,31.293 cw(c11.317,32.996) PMOD4.4@10.113,31.792 ; U5.M4@20.337,46.765 cw(c19.841,46.765) 20.192,46.415 cw(c20.542,46.064) U5.M4@20.542,46.56 ; U5.M4@20.426,46.765 cw(c20.144,46.765) 20.343,46.566 cw(c20.542,46.367) U5.M4@20.542,46.649
PTE25: PMOD4.5 U5.K5 | length 41.4
  Top Layer w0.089: PMOD4.5@9.614,28.753 12.548,28.753 13.094,29.299 13.094,45.352 13.335,45.593 20.066,45.593 21.946,47.473 U5.K5@22.664,47.473 ; PMOD4.5@9.861,28.505 cw(c10.459,27.908) 10.459,28.753 cw(c10.459,29.598) PMOD4.5@9.861,29 ; PMOD4.5@9.924,28.442 cw(c10.673,27.693) 10.673,28.753 cw(c10.673,29.812) PMOD4.5@9.924,29.063 ; PMOD4.5@9.987,28.38 cw(c10.888,27.479) 10.888,28.753 cw(c10.888,30.027) PMOD4.5@9.987,29.126 ; PMOD4.5@10.05,28.317 cw(c11.103,27.264) 11.103,28.753 cw(c11.103,30.242) PMOD4.5@10.05,29.189 ; PMOD4.5@10.113,28.254 cw(c11.317,27.049) 11.317,28.753 cw(c11.317,30.456) PMOD4.5@10.113,29.252 ; U5.K5@22.518,47.327 ccw(c22.167,46.976) 22.167,47.473 ccw(c22.167,47.969) U5.K5@22.518,47.618 ; U5.K5@22.581,47.39 ccw(c22.382,47.191) 22.382,47.473 ccw(c22.382,47.754) U5.K5@22.581,47.555
PTE26: R52.2 U5.K4 | length 15.5
  Top Layer w0.089: v1(21.25,48.18) U5.K4@21.957,48.18 ; v1@21.32,48.121 cw(c21.442,48.02) 21.484,48.174 ; v1@21.32,48.238 ccw(c21.442,48.339) 21.484,48.186 ; v1@21.377,48.052 cw(c21.685,47.744) 21.685,48.18 cw(c21.685,48.616) v1@21.377,48.307 ; v1@21.389,48.065 cw(c21.56,47.923) 21.617,48.138 ; v1@21.389,48.295 ccw(c21.56,48.436) 21.617,48.222 ; v1@21.406,48.089 cw(c21.622,47.965) 21.557,48.206 ; v1@21.406,48.27 ccw(c21.622,48.395) 21.557,48.154 ; U5.K4@21.811,48.034 ccw(c21.46,47.683) 21.46,48.18 ccw(c21.46,48.676) U5.K4@21.811,48.325 ; U5.K4@21.874,48.097 ccw(c21.675,47.898) 21.675,48.18 ccw(c21.675,48.461) U5.K4@21.874,48.262
  Bottom Layer w0.089: R52.2@15.522,48.617 cw(c14.915,48.01) 15.773,48.01 cw(c16.632,48.01) R52.2@16.025,48.617 ; R52.2@15.585,48.68 cw(c15.13,48.224) 15.773,48.224 cw(c16.417,48.224) R52.2@15.962,48.68 ; R52.2@15.648,48.742 cw(c15.344,48.439) 15.773,48.439 cw(c16.203,48.439) R52.2@15.899,48.742 ; R52.2@15.773,48.868 15.773,47.244 16.338,46.68 18.448,46.68 18.453,46.685 19.755,46.685 v1(21.25,48.18) ; v1@21.069,48.18 cw(c20.633,48.18) 20.941,47.871 cw(c21.25,47.563) v1@21.25,47.999
PTE27: S4.1 U5.J4 | length 18.7
  Top Layer w0.089: S4.1@16.034,47.358 16.316,47.076 v1(17.78,47.076) ; S4.1@16.221,46.897 cw(c16.654,46.464) 16.654,47.076 ; S4.1@16.221,47.27 ccw(c16.688,47.738) 16.688,47.076 ; S4.1@16.283,46.834 cw(c16.868,46.249) 16.868,47.076 ; S4.1@16.283,47.333 ccw(c16.903,47.952) 16.903,47.076 ; S4.1@16.346,46.771 cw(c17.083,46.034) 17.083,47.076 ; S4.1@16.346,47.396 ccw(c17.118,48.167) 17.118,47.076 ; S4.1@16.409,46.708 cw(c17.298,45.82) 17.298,47.076 ; S4.1@16.409,47.458 ccw(c17.332,48.381) 17.332,47.076 ; v1@17.652,46.948 ccw(c17.344,46.64) 17.344,47.076 ccw(c17.344,47.512) v1@17.652,47.204 ; v1(21.957,48.887) U5.J4@22.664,48.887 ; v1@22.027,48.828 cw(c22.15,48.727) 22.191,48.881 ; v1@22.027,48.945 ccw(c22.15,49.046) 22.191,48.893 ; v1@22.084,48.759 cw(c22.393,48.451) 22.393,48.887 cw(c22.393,49.323) v1@22.084,49.014 ; v1@22.096,48.772 cw(c22.267,48.63) 22.324,48.845 ; v1@22.096,49.002 ccw(c22.267,49.143) 22.324,48.929 ; v1@22.113,48.797 cw(c22.329,48.672) 22.265,48.913 ; v1@22.113,48.977 ccw(c22.329,49.102) 22.265,48.861 ; U5.J4@22.518,48.741 ccw(c22.167,48.391) 22.167,48.887 ccw(c22.167,49.383) U5.J4@22.518,49.032 ; U5.J4@22.581,48.804 ccw(c22.382,48.605) 22.382,48.887 ccw(c22.382,49.168) U5.J4@22.581,48.969
  Bottom Layer w0.089: v1(17.78,47.076) 19.593,47.076 20.853,48.336 20.853,48.344 21.396,48.887 v1(21.957,48.887) ; v1@17.908,46.948 cw(c18.216,46.64) 18.216,47.076 cw(c18.216,47.512) v1@17.908,47.204 ; v1@21.829,48.759 ccw(c21.521,48.451) 21.521,48.887 ccw(c21.521,49.323) v1@21.829,49.014
PTE28: Shiel1.27 U5.H4 | length 58.8
  Top Layer w0.089: U5.H4@23.371,49.594 v3(24.078,49.594) ; U5.H4@23.453,49.511 cw(c23.652,49.312) 23.652,49.594 cw(c23.652,49.876) U5.H4@23.453,49.676 ; U5.H4@23.516,49.449 cw(c23.867,49.098) 23.867,49.594 cw(c23.867,50.09) U5.H4@23.516,49.739 ; v3@23.967,49.483 ccw(c23.699,49.215) 23.699,49.594 ccw(c23.699,49.973) v3@23.967,49.705
  Bottom Layer w0.089: v3(24.078,49.594) 24.605,49.594 26.505,51.493 26.505,67.808 26.706,68.008 54.915,68.008 55.469,68.562 Shiel1.27@55.469,71.285 ; v3@24.189,49.483 cw(c24.457,49.215) 24.457,49.594 cw(c24.457,49.973) v3@24.189,49.705 ; Shiel1.27@55.146,70.248 cw(c54.369,69.47) 55.469,69.47 cw(c56.568,69.47) Shiel1.27@55.791,70.248 ; Shiel1.27@55.209,70.311 cw(c54.583,69.685) 55.469,69.685 cw(c56.354,69.685) Shiel1.27@55.728,70.311 ; Shiel1.27@55.272,70.374 cw(c54.798,69.9) 55.469,69.9 cw(c56.139,69.9) Shiel1.27@55.665,70.374
QSPI_CS: R15.2 U1.L12 U2.1 | length 29.1
  Top Layer w0.089: v1(55.444,54.873) U1.L12@56.151,54.873 ; v1@55.572,54.745 cw(c55.88,54.437) 55.88,54.873 cw(c55.88,55.309) v1@55.572,55.001 ; U1.L12@56.024,54.745 ccw(c55.715,54.437) 55.715,54.873 ccw(c55.715,55.309) U1.L12@56.024,55.001
  Bottom Layer w0.089: U2.1@45.447,66.764 46.571,66.764 ; U2.1@45.672,66.664 cw(c45.914,66.422) 45.914,66.764 cw(c45.914,67.106) U2.1@45.672,66.864 ; U2.1@45.735,66.601 cw(c46.128,66.207) 46.128,66.764 cw(c46.128,67.32) U2.1@45.735,66.927 ; 46.62,66.764 ccw(c46.62,67.666) R15.2@47.258,67.028 ; 46.681,66.764 cw(c46.681,65.949) R15.2@47.258,66.525 ; 46.835,66.764 ccw(c46.835,67.451) R15.2@47.321,66.965 ; 46.896,66.764 cw(c46.896,66.164) R15.2@47.321,66.588 ; 47.049,66.764 ccw(c47.049,67.236) R15.2@47.384,66.902 ; R15.2@47.496,66.764 46.571,66.764 ; v1@55.316,54.745 ccw(c55.008,54.437) 55.008,54.873 ccw(c55.008,55.309) v1@55.316,55.001 ; v1(55.444,54.873) 54.591,54.873 51.679,57.785 50.863,57.785 50.559,58.09 50.559,67.335 50.305,67.589 46.901,67.589 46.571,67.259 46.571,66.764
QSPI_DQ0: R23.1 U1.J13 | length 18
  Top Layer w0.089: U1.J13@53.902,54.294 ccw(c53.594,54.602) 54.03,54.602 ccw(c54.466,54.602) U1.J13@54.158,54.294 ; v1@53.902,54.745 cw(c53.594,54.437) 54.03,54.437 cw(c54.466,54.437) v1@54.158,54.745 ; U1.J13@54.03,54.166 v1(54.03,54.873)
  Bottom Layer w0.089: R23.1@43.936,57.112 51.791,57.112 v1(54.03,54.873) ; R23.1@44.119,56.916 cw(c44.593,56.441) 44.593,57.112 cw(c44.593,57.782) R23.1@44.119,57.308 ; R23.1@44.182,56.853 cw(c44.808,56.227) 44.808,57.112 cw(c44.808,57.997) R23.1@44.182,57.371 ; R23.1@44.245,56.79 cw(c45.023,56.012) 45.023,57.112 cw(c45.023,58.212) R23.1@44.245,57.434 ; v1@53.849,54.873 ccw(c53.413,54.873) 53.722,55.181 ccw(c54.03,55.489) v1@54.03,55.054
QSPI_DQ2: R17.2 U1.K15 | length 13.4
  Top Layer w0.089: v1@49.682,60.31 cw(c49.682,59.878) 49.988,60.183 ; v1@49.682,60.488 53.323,56.848 U1.K15@53.323,56.287 ; v1@49.863,60.49 ccw(c50.303,60.49) 49.992,60.179 ; U1.K15@53.195,56.415 ccw(c52.887,56.723) 53.323,56.723 ccw(c53.759,56.723) U1.K15@53.45,56.415
  Bottom Layer w0.089: R17.2@48.909,64.224 49.517,64.224 ; R17.2@49.142,64.093 cw(c49.365,63.967) 49.365,64.224 cw(c49.365,64.481) R17.2@49.142,64.355 ; R17.2@49.219,64.05 cw(c49.517,63.882) 49.517,64.224 ; R17.2@49.219,64.398 ccw(c49.517,64.566) 49.517,64.224 ; v1@49.555,60.618 ccw(c49.247,60.926) 49.682,60.926 ccw(c50.118,60.926) v1@49.81,60.618 ; v1(49.682,60.49) 49.682,64.059 49.517,64.224
QSPI_DQ3: R22.1 U1.K16 | length 31
  Top Layer w0.089: v1@51.001,58.428 cw(c51.001,57.992) 51.31,58.3 cw(c51.618,58.609) v1@51.182,58.609 ; v1(51.001,58.609) U1.K16@52.616,56.994 ; U1.K16@52.435,56.994 ccw(c51.999,56.994) 52.307,57.303 ccw(c52.616,57.611) U1.K16@52.616,57.175
  Bottom Layer w0.089: R22.1@36.319,65.494 36.879,65.494 ; R22.1@36.56,65.38 cw(c36.739,65.296) 36.739,65.494 cw(c36.739,65.692) R22.1@36.56,65.607 ; R22.1@36.641,65.343 cw(c36.879,65.23) 36.879,65.494 ; R22.1@36.641,65.645 ccw(c36.879,65.758) 36.879,65.494 ; v1@50.874,58.736 ccw(c50.565,59.045) 51.001,59.045 ccw(c51.437,59.045) v1@51.129,58.736 ; v1(51.001,58.609) 51.001,67.401 50.609,67.793 37.387,67.793 37.044,67.45 37.044,65.659 36.879,65.494
QSPI_SCK: MCU_CFG1.4 R20.1 U1.E8 U2.6 U5.B1 | length 67.4
  Top Layer w0.089: U5.B1@25.287,55.958 ccw(c24.79,55.958) 25.141,56.309 ccw(c25.492,56.66) U5.B1@25.492,56.163 ; U5.B1@25.376,55.958 ccw(c25.094,55.958) 25.293,56.157 ccw(c25.492,56.356) U5.B1@25.492,56.075 ; U5.B1@25.492,55.958 24.816,56.634 24.816,62.509 24.994,62.687 v1@40.691,62.687 ; v1@31.343,62.56 ccw(c31.035,62.251) 31.035,62.687 ccw(c31.035,63.123) v1@31.343,62.815 ; v1@31.598,62.56 cw(c31.906,62.251) 31.906,62.687 cw(c31.906,63.123) v1@31.598,62.815 ; 40.125,62.687 cw(c40.125,62.121) v1@40.525,62.521 ; 40.309,62.687 ccw(c40.309,62.993) v1@40.525,62.777 ; 40.339,62.687 cw(c40.339,62.336) v1@40.588,62.584 ; v1(53.911,47.803) U1.E8@54.737,47.802 ; v1@54.039,47.675 cw(c54.345,47.369) 54.345,47.802 ; v1@54.039,47.93 ccw(c54.349,48.241) 54.349,47.802 ; U1.E8@54.609,47.674 ccw(c54.301,47.366) 54.301,47.802 ccw(c54.301,48.238) U1.E8@54.609,47.93
  Bottom Layer w0.089: MCU_CFG1.4@31.202,64.641 cw(c30.552,63.991) 31.471,63.991 cw(c32.389,63.991) MCU_CFG1.4@31.74,64.641 ; MCU_CFG1.4@31.264,64.703 cw(c30.766,64.206) 31.471,64.206 cw(c32.175,64.206) MCU_CFG1.4@31.677,64.703 ; MCU_CFG1.4@31.327,64.766 cw(c30.981,64.42) 31.471,64.42 cw(c31.96,64.42) MCU_CFG1.4@31.614,64.766 ; v1@31.343,62.815 ccw(c31.035,63.123) 31.471,63.123 ccw(c31.906,63.123) v1@31.598,62.815 ; v1(31.471,62.687) MCU_CFG1.4@31.471,64.91 ; U2.6@39.797,64.224 40.475,64.224 ; U2.6@40.022,64.124 cw(c40.262,63.887) 40.262,64.224 cw(c40.262,64.561) U2.6@40.022,64.324 ; U2.6@40.085,64.062 cw(c40.475,63.675) 40.475,64.224 ; U2.6@40.085,64.386 ccw(c40.475,64.772) 40.475,64.224 ; v1@40.525,62.521 cw(c40.186,62.183) 40.665,62.183 ; v1@40.525,62.777 ccw(c40.186,63.116) 40.665,63.116 ; v1@40.588,62.584 cw(c40.401,62.397) 40.665,62.397 ; v1@40.588,62.714 ccw(c40.401,62.901) 40.665,62.901 ; 40.665,62.244 cw(c41.058,62.244) v1@40.78,62.521 ; 40.665,63.054 ccw(c41.058,63.054) v1@40.78,62.777 ; R20.1@41.327,58.983 cw(c41.152,58.642) 41.535,58.642 ; R20.1@41.368,59.062 cw(c41.227,58.788) 41.535,58.788 cw(c41.844,58.788) R20.1@41.703,59.062 ; R20.1@41.392,60.221 ccw(c41.325,60.42) 41.535,60.42 ; R20.1@41.42,60.136 ccw(c41.366,60.297) 41.535,60.297 ccw(c41.705,60.297) R20.1@41.651,60.136 ; R20.1@41.679,60.221 cw(c41.746,60.42) 41.535,60.42 ; R20.1@41.744,58.983 ccw(c41.919,58.642) 41.535,58.642 ; v1@53.784,47.675 ccw(c53.476,47.367) 53.476,47.803 ccw(c53.476,48.239) v1@53.784,47.93 ; v1(53.911,47.803) 53.341,47.803 47.664,53.48 42.494,53.48 42.207,53.767 42.207,57.971 41.535,58.642 ; 40.475,64.224 40.665,64.033 40.665,60.795 40.78,60.681 41.275,60.681 41.535,60.42 ; 41.535,58.642 R20.1@41.535,59.588 41.535,60.42
  other v1: 40.653,62.649
RTC_WAKE: PMOD4.6 U5.L5 | length 32.2
  Top Layer w0.089: PMOD4.6@9.614,26.213 10.414,26.213 ; PMOD4.6@10.314,26.125 cw(c10.414,26.112) 10.414,26.213 ; PMOD4.6@10.314,26.301 ccw(c10.414,26.314) 10.414,26.213 ; U5.L5@21.811,46.62 cw(c21.46,46.269) 21.957,46.269 cw(c22.453,46.269) U5.L5@22.102,46.62 ; U5.L5@21.874,46.683 cw(c21.675,46.484) 21.957,46.484 cw(c22.238,46.484) U5.L5@22.039,46.683 ; U5.L5@21.957,46.765 21.957,46.087 21.171,45.301 13.411,45.301 13.271,45.161 13.271,29.07 10.414,26.213
RTCX1: R37.2 U5.M6 | length 5.9
  Top Layer w0.152: R37.2@20.19,43.938 ccw(c20.19,44.791) 20.793,44.188 ; R37.2@20.19,44.09 ccw(c20.19,45.312) 21.053,44.448 ; R37.2@20.19,44.243 ccw(c20.19,45.832) 21.314,44.708 ; R37.2@20.243,43.865 20.471,43.865 U5.M6@21.957,45.351 ; U5.M6@21.783,45.351 cw(c21.363,45.351) 21.66,45.055 cw(c21.957,44.758) U5.M6@21.957,45.177
RTCX2: R36.2 U5.M7 | length 5.8
  Top Layer w0.152: R36.2@21.158,42.964 21.158,43.138 U5.M7@22.664,44.644 ; R36.2@21.256,42.898 cw(c22.074,42.898) 21.495,43.476 ; R36.2@21.408,42.898 cw(c22.594,42.898) 21.756,43.736 ; R36.2@21.561,42.898 cw(c23.114,42.898) 22.016,43.996 ; U5.M7@22.49,44.644 cw(c22.07,44.644) 22.367,44.347 cw(c22.664,44.051) U5.M7@22.664,44.47
SPI2_PCS0: MCU_CFG1.2 U5.B2 | length 17.6
  Top Layer w0.089: U5.B2@26.054,55.396 ccw(c25.703,55.747) 26.199,55.747 ccw(c26.695,55.747) U5.B2@26.345,55.396 ; U5.B2@26.117,55.333 ccw(c25.918,55.532) 26.199,55.532 ccw(c26.481,55.532) U5.B2@26.282,55.333 ; U5.B2@26.199,55.251 26.199,55.943 26.708,56.451 26.708,60.998 27.407,61.697 v1(28.931,61.697) ; v1@28.803,61.569 ccw(c28.495,61.261) 28.495,61.697 ccw(c28.495,62.132) v1@28.803,61.824
  Bottom Layer w0.089: MCU_CFG1.2@28.662,64.641 cw(c28.012,63.991) 28.931,63.991 cw(c29.849,63.991) MCU_CFG1.2@29.2,64.641 ; MCU_CFG1.2@28.724,64.703 cw(c28.226,64.206) 28.931,64.206 cw(c29.635,64.206) MCU_CFG1.2@29.137,64.703 ; MCU_CFG1.2@28.787,64.766 cw(c28.441,64.42) 28.931,64.42 cw(c29.42,64.42) MCU_CFG1.2@29.074,64.766 ; v1@28.803,61.824 ccw(c28.495,62.132) 28.931,62.132 ccw(c29.366,62.132) v1@29.058,61.824 ; v1(28.931,61.697) MCU_CFG1.2@28.931,64.91
SPI2_SIN: MCU_CFG1.1 U5.C2 | length 17.9
  Top Layer w0.089: U5.C2@25.347,54.689 ccw(c24.996,55.04) 25.492,55.04 ccw(c25.988,55.04) U5.C2@25.637,54.689 ; U5.C2@25.41,54.626 ccw(c25.211,54.825) 25.492,54.825 ccw(c25.774,54.825) U5.C2@25.575,54.626 ; U5.C2@25.492,54.544 25.492,55.236 25.997,55.74 25.997,56.185 25.4,56.782 25.4,60.719 v1@26.93,62.249 ; 26.607,61.926 ccw(c26.277,62.255) v1@26.743,62.255 ; 26.637,61.956 cw(c26.924,61.67) v1@26.924,62.075 ; 26.759,62.077 ccw(c26.58,62.255) v1@26.832,62.255
  Bottom Layer w0.089: v1(26.924,62.255) 27.661,62.992 MCU_CFG1.1@27.661,64.91 ; v1@26.924,62.436 ccw(c26.924,62.872) 27.232,62.564 ccw(c27.54,62.255) v1@27.105,62.255 ; MCU_CFG1.1@27.392,64.641 cw(c26.742,63.991) 27.661,63.991 cw(c28.579,63.991) MCU_CFG1.1@27.93,64.641 ; MCU_CFG1.1@27.454,64.703 cw(c26.956,64.206) 27.661,64.206 cw(c28.365,64.206) MCU_CFG1.1@27.867,64.703 ; MCU_CFG1.1@27.517,64.766 cw(c27.171,64.42) 27.661,64.42 cw(c28.15,64.42) MCU_CFG1.1@27.804,64.766
SRAM-A0: U1.H1 U6.A3 | length 10.4
  Top Layer w0.089: U1.H1@61.808,44.974 62.405,44.974 62.468,44.911 62.594,44.785 62.486,44.677 62.612,44.551 62.719,44.659 62.845,44.534 62.737,44.426 62.863,44.3 62.971,44.408 63.096,44.282 62.989,44.174 63.114,44.049 63.222,44.156 63.348,44.031 63.24,43.923 63.366,43.797 63.474,43.905 63.599,43.779 63.492,43.671 63.617,43.546 63.725,43.653 63.851,43.528 63.743,43.42 63.869,43.294 63.977,43.402 64.102,43.276 63.994,43.169 64.12,43.043 64.228,43.151 64.354,43.025 64.246,42.917 64.372,42.791 64.479,42.899 64.605,42.773 64.497,42.666 64.623,42.54 64.731,42.648 64.789,42.589 64.862,42.516 64.862,42.393 64.862,42.215 64.862,42.037 65.015,42.037 65.015,41.86 64.862,41.86 64.862,41.682 65.015,41.682 65.015,41.504 64.862,41.504 64.862,41.326 65.015,41.326 65.015,41.148 64.862,41.148 64.862,40.971 U6.A3@64.862,40.882 ; U1.H1@61.936,44.846 cw(c62.244,44.538) 62.244,44.974 cw(c62.244,45.409) U1.H1@61.936,45.101 ; U6.A3@64.791,40.953 ccw(c64.62,41.124) 64.862,41.124 ccw(c65.105,41.124) U6.A3@64.933,40.953
SRAM-A1: U1.J1 U6.A4 | length 14.5
  Top Layer w0.089: U1.J1@62.515,45.5 cw(c62.515,45.064) 62.823,45.372 cw(c63.132,45.681) U1.J1@62.696,45.681 ; U1.J1@62.515,45.681 62.829,45.366 62.937,45.474 63.063,45.348 62.955,45.241 62.847,45.133 62.973,45.007 63.081,45.115 63.189,45.223 63.314,45.097 63.207,44.989 63.099,44.881 63.225,44.756 63.332,44.863 63.44,44.971 63.566,44.845 63.35,44.63 63.476,44.504 63.584,44.612 63.692,44.72 63.817,44.594 63.602,44.379 63.728,44.253 63.835,44.361 63.943,44.468 64.069,44.343 63.853,44.127 63.979,44.001 64.087,44.109 64.194,44.217 64.32,44.091 64.105,43.876 64.23,43.75 64.338,43.858 64.446,43.965 64.572,43.84 64.464,43.732 64.356,43.624 64.482,43.498 64.59,43.606 64.697,43.714 64.823,43.588 64.715,43.48 64.608,43.373 64.733,43.247 64.841,43.355 64.949,43.463 65.075,43.337 64.967,43.229 64.859,43.121 64.985,42.996 65.093,43.103 65.2,43.211 65.326,43.085 65.218,42.978 65.11,42.87 65.236,42.744 65.344,42.852 65.452,42.96 65.577,42.834 65.47,42.726 65.964,42.232 65.964,40.922 U6.A4@65.393,40.351 ; U6.A4@65.393,40.452 ccw(c65.393,40.695) 65.564,40.523 ccw(c65.736,40.351) U6.A4@65.493,40.351
SRAM-A2: U1.J4 U6.A5 | length 12.2
  Top Layer w0.089: U1.J4@60.394,47.802 61.208,47.802 66.332,42.678 66.332,40.23 U6.A5@65.923,39.821 ; U1.J4@60.522,47.674 cw(c60.83,47.366) 60.83,47.802 cw(c60.83,48.238) U1.J4@60.522,47.93 ; U6.A5@65.923,39.922 ccw(c65.923,40.164) 66.095,39.993 ccw(c66.266,39.821) U6.A5@66.024,39.821
SRAM-A3: U1.H3 U6.B3 | length 11.2
  Top Layer w0.089: U1.H3@60.266,46.26 cw(c59.958,45.952) 60.394,45.952 cw(c60.83,45.952) U1.H3@60.522,46.26 ; U1.H3@60.394,46.388 60.394,45.827 61.707,44.514 62.293,44.514 62.356,44.451 62.482,44.325 62.374,44.217 62.5,44.091 62.608,44.199 62.734,44.073 62.626,43.966 62.751,43.84 62.859,43.948 62.985,43.822 62.877,43.714 63.003,43.589 63.111,43.696 63.236,43.571 63.129,43.463 63.254,43.337 63.362,43.445 63.488,43.319 63.38,43.211 63.506,43.086 63.614,43.193 63.627,43.18 63.824,42.983 63.831,42.976 63.957,42.85 64.083,42.724 64.208,42.599 64.101,42.491 64.226,42.365 64.334,42.473 64.46,42.347 64.586,42.221 64.649,42.158 64.649,41.115 64.332,40.799 U6.B3@64.332,40.351 ; U6.B3@64.261,40.422 ccw(c64.089,40.594) 64.332,40.594 ccw(c64.575,40.594) U6.B3@64.403,40.422
SRAM-A4: U1.H2 U6.B4 | length 11
  Top Layer w0.089: U1.H2@61.101,45.681 61.949,45.681 65.423,42.207 65.444,42.186 65.507,42.123 65.507,41.986 65.507,41.808 65.761,41.808 65.761,41.631 65.507,41.631 65.253,41.631 65.253,41.453 65.507,41.453 65.761,41.453 65.761,41.275 65.507,41.275 65.507,41.097 65.507,41.008 64.862,40.364 U6.B4@64.862,39.821 ; U1.H2@61.229,45.553 cw(c61.537,45.245) 61.537,45.681 cw(c61.537,46.117) U1.H2@61.229,45.808 ; U6.B4@64.791,39.892 ccw(c64.62,40.064) 64.862,40.064 ccw(c65.105,40.064) U6.B4@64.933,39.892
SRAM-A5: U1.H4 U6.C3 | length 18.4
  Top Layer w0.089: U1.H4@59.687,47.095 v1(60.394,47.095) ; U1.H4@59.814,46.967 cw(c60.123,46.659) 60.123,47.095 cw(c60.123,47.531) U1.H4@59.814,47.223 ; v1@60.266,46.967 ccw(c59.958,46.659) 59.958,47.095 ccw(c59.958,47.531) v1@60.266,47.223 ; v1(63.271,39.821) U6.C3@63.802,39.821 ; v1@63.399,39.693 cw(c63.707,39.385) 63.707,39.821 cw(c63.707,40.257) v1@63.399,39.949 ; U6.C3@63.731,39.75 ccw(c63.559,39.578) 63.559,39.821 ccw(c63.559,40.064) U6.C3@63.731,39.892
  Bottom Layer w0.089: v1(60.394,47.095) 60.681,46.808 ; v1@60.403,46.915 cw(c60.422,46.55) 60.681,46.808 ; v1@60.574,47.085 ccw(c60.939,47.066) 60.681,46.808 ; v1@63.091,39.834 ccw(c62.75,39.859) 62.992,40.1 ; v1@63.258,40.001 cw(c63.234,40.342) 62.992,40.1 ; v1(63.271,39.821) 62.992,40.1 ; 60.681,46.808 60.681,46.139 62.992,43.828 62.992,42.227 62.992,42.164 62.738,42.164 62.738,41.986 62.992,41.986 63.246,41.986 63.246,41.808 62.992,41.808 62.738,41.808 62.738,41.631 62.992,41.631 63.246,41.631 63.246,41.453 62.992,41.453 62.738,41.453 62.738,41.275 62.992,41.275 63.246,41.275 63.246,41.097 62.992,41.097 62.738,41.097 62.738,40.919 62.992,40.919 63.246,40.919 63.246,40.742 62.992,40.742 62.738,40.742 62.738,40.564 62.992,40.564 63.246,40.564 63.246,40.386 62.992,40.386 62.992,40.208 62.992,40.119 62.992,40.1
SRAM-A6: U1.J5 U6.C4 | length 19.2
  Top Layer w0.089: U1.J5@59.687,48.509 60.393,48.509 v1(60.503,48.4) ; U1.J5@59.803,48.509 cw(c59.803,47.7) v1@60.375,48.272 ; U1.J5@59.814,48.381 cw(c60.123,48.073) 60.123,48.509 cw(c60.123,48.945) U1.J5@59.814,48.637 ; 60.018,48.509 cw(c60.018,47.914) v1@60.438,48.335 ; 60.232,48.509 cw(c60.232,48.129) v1@60.501,48.398 ; v1@64.204,39.693 cw(c63.896,39.385) 64.332,39.385 cw(c64.768,39.385) v1@64.46,39.693 ; U6.C4@64.261,39.362 ccw(c64.089,39.533) 64.332,39.533 ccw(c64.575,39.533) U6.C4@64.403,39.362 ; U6.C4@64.332,39.291 v1(64.332,39.821)
  Bottom Layer w0.089: v1@60.503,48.219 cw(c60.503,47.782) 60.812,48.091 ; v1(60.503,48.4) 66.04,42.863 66.04,41.77 64.332,40.062 ; v1@60.683,48.4 ccw(c61.118,48.4) 60.811,48.092 ; v1@64.246,39.821 cw(c64.62,39.821) 64.356,40.086 ; v1@64.281,39.994 ccw(c64.261,40.062) 64.332,40.062 ; v1(64.332,39.821) 64.332,40.062 ; v1@64.335,39.821 cw(c64.924,39.821) 64.507,40.238 ; v1@64.383,39.994 cw(c64.403,40.062) 64.332,40.062 ; v1@64.424,39.821 cw(c65.228,39.821) 64.659,40.389 ; v1@64.513,39.821 cw(c65.531,39.821) 64.811,40.541
SRAM-A7: U1.L3 U6.D4 | length 19.3
  Top Layer w0.089: U1.L3@62.515,48.509 63.327,48.509 67.656,44.181 67.656,38.617 65.869,36.83 65.202,36.83 63.802,38.23 U6.D4@63.802,38.76 ; U1.L3@62.643,48.381 cw(c62.951,48.073) 62.951,48.509 cw(c62.951,48.945) U1.L3@62.643,48.637 ; U6.D4@63.731,38.689 cw(c63.559,38.518) 63.802,38.518 cw(c64.044,38.518) U6.D4@63.873,38.689
SRAM-A8: U1.C3 U6.H2 | length 16.3
  Top Layer w0.089: U1.C3@56.731,42.725 cw(c56.422,42.416) 56.858,42.416 cw(c57.294,42.416) U1.C3@56.986,42.725 ; U1.C3@56.858,42.852 56.858,41.999 58.153,40.704 58.153,40.437 57.899,40.437 57.899,40.259 58.407,40.259 58.407,40.081 57.899,40.081 57.899,39.904 58.407,39.904 58.407,39.726 57.899,39.726 57.899,39.548 58.407,39.548 58.407,39.37 57.899,39.37 57.899,39.192 58.407,39.192 58.407,39.015 57.899,39.015 57.899,38.837 58.407,38.837 58.407,38.659 57.899,38.659 57.899,38.481 58.407,38.481 58.407,38.303 57.899,38.303 57.899,38.126 58.407,38.126 58.407,37.948 58.153,37.948 58.153,37.732 58.185,37.7 U6.H2@60.62,37.7 ; U6.H2@60.549,37.629 ccw(c60.377,37.457) 60.377,37.7 ccw(c60.377,37.942) U6.H2@60.549,37.771
SRAM-A9: U1.B2 U6.H3 | length 9.3
  Top Layer w0.089: U1.B2@56.731,41.31 cw(c56.422,41.002) 56.858,41.002 cw(c57.294,41.002) U1.B2@56.986,41.31 ; U1.B2@56.858,41.438 56.858,40.728 57.277,40.31 57.277,37.338 57.452,37.163 U6.H3@61.156,37.163 ; 60.892,37.163 ccw(c60.892,37.427) U6.H3@61.079,37.241 ; 60.923,37.163 cw(c60.923,36.942) U6.H3@61.079,37.098
SRAM-A10: U1.A3 U6.H4 | length 12
  Top Layer w0.089: U1.A3@55.316,41.31 cw(c55.008,41.002) 55.444,41.002 cw(c55.88,41.002) U1.A3@55.572,41.31 ; U1.A3@55.444,41.438 55.444,36.783 55.595,36.633 U6.H4@61.687,36.633 ; 61.422,36.633 ccw(c61.422,36.897) U6.H4@61.609,36.71 ; 61.453,36.633 cw(c61.453,36.412) U6.H4@61.609,36.568
SRAM-A11: U1.B4 U6.H5 | length 15.4
  Top Layer w0.089: U1.B4@55.316,42.725 cw(c55.008,42.416) 55.444,42.416 cw(c55.88,42.416) U1.B4@55.572,42.725 ; U1.B4@55.444,42.852 55.444,42.269 54.775,41.6 54.775,36.411 55.084,36.102 U6.H5@62.217,36.102 ; 61.953,36.102 ccw(c61.953,36.367) U6.H5@62.14,36.18 ; 61.983,36.102 cw(c61.983,35.881) U6.H5@62.14,36.038